# Altium PCB STM32F103ZE.PcbDoc
Units mil, origin at the board's own origin, x right, y up, seen from the top; angles counter-clockwise.
Board outline 5965 x 5965 mil, 2 copper layers (TopLayer, BottomLayer); 20 components, 0 nets, 391 pads, 5 vias.
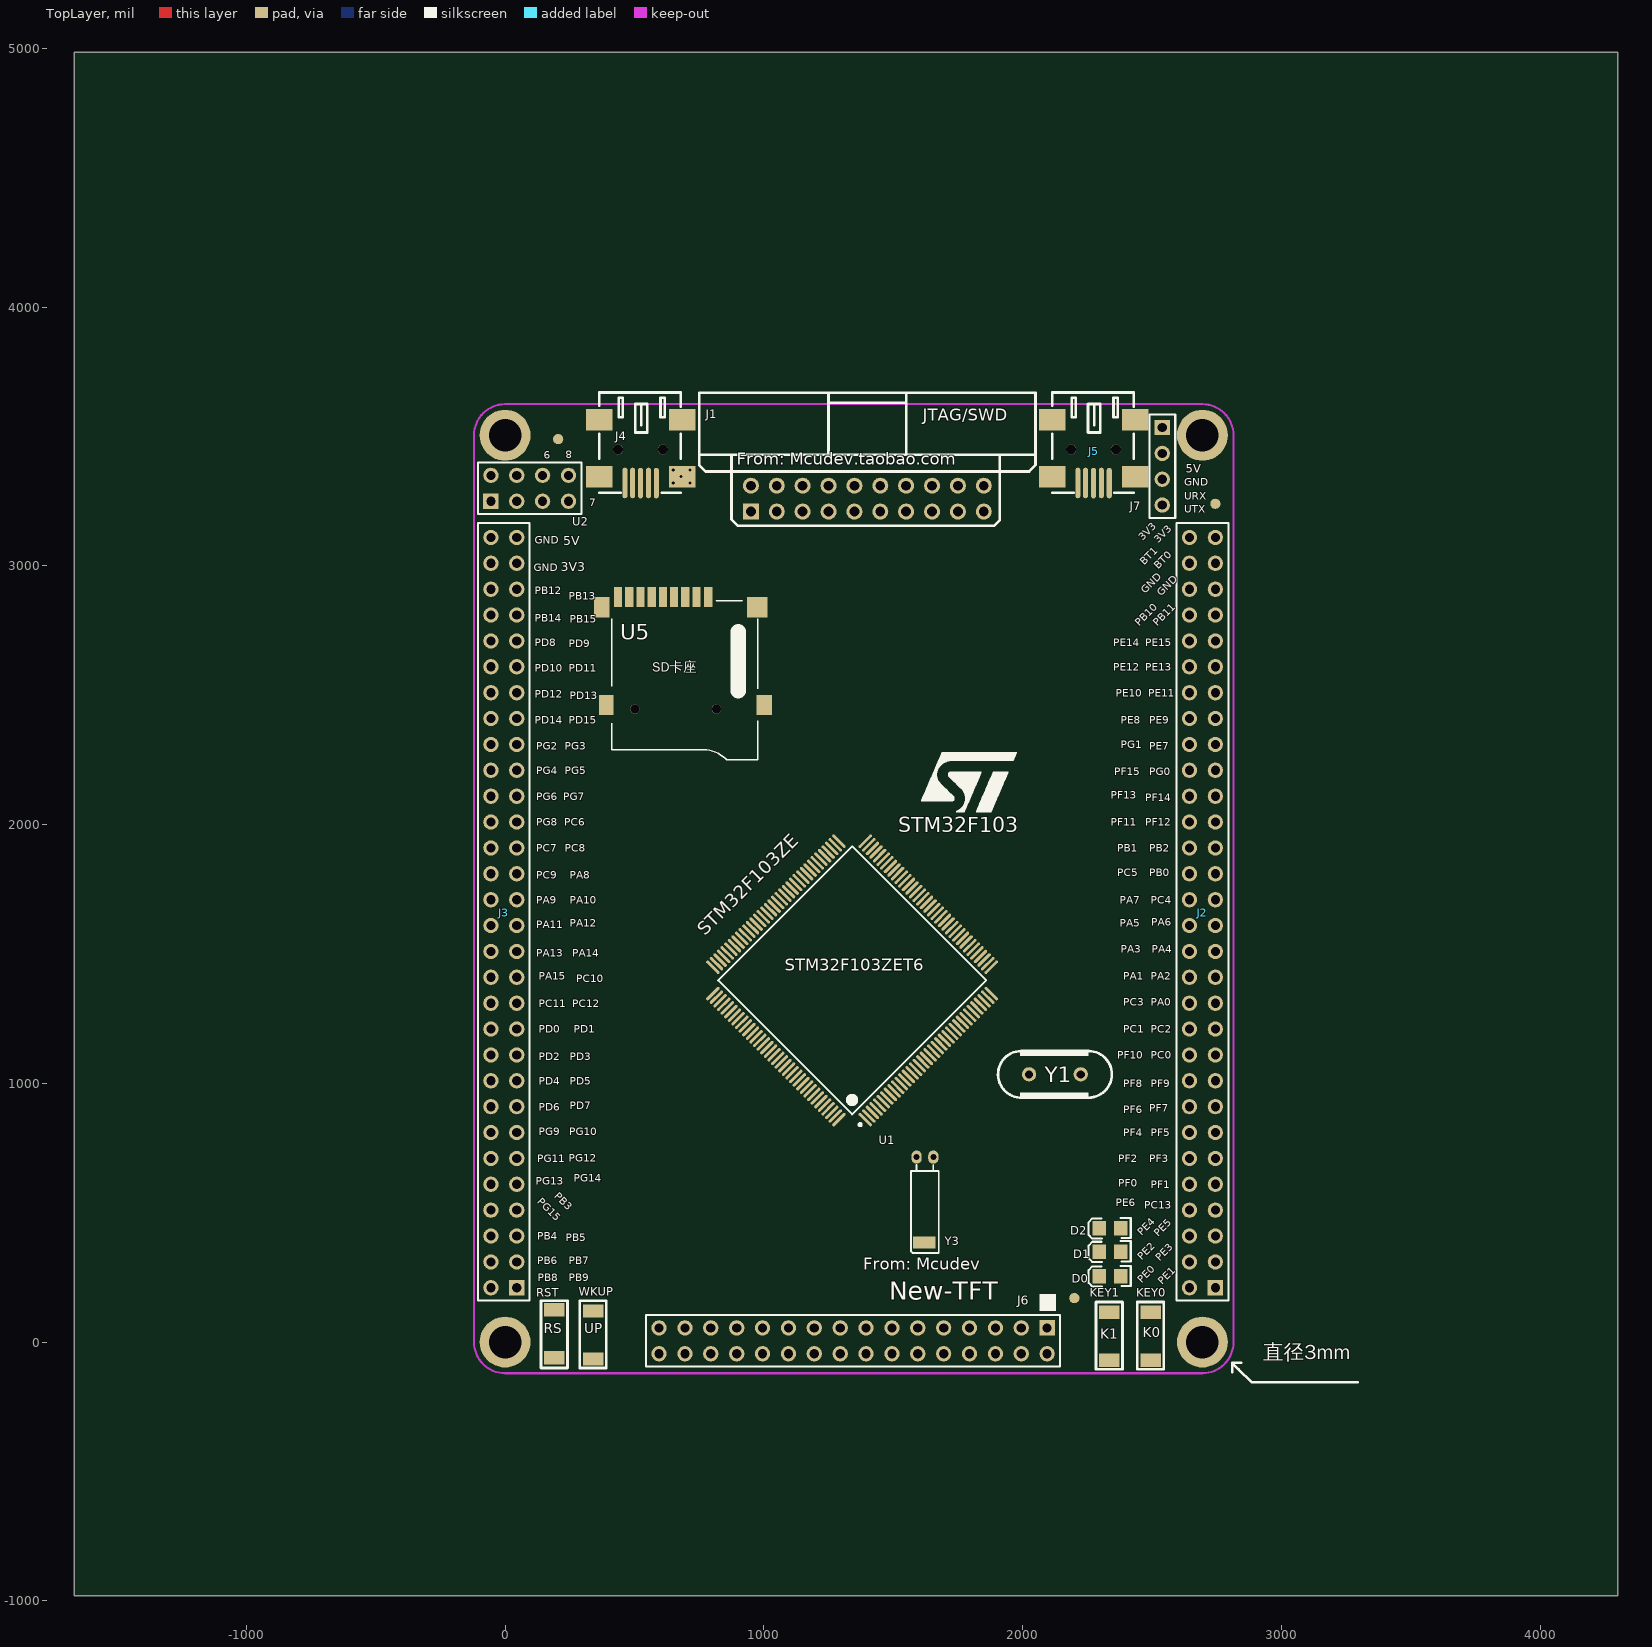
[diagram p0: TopLayer view]
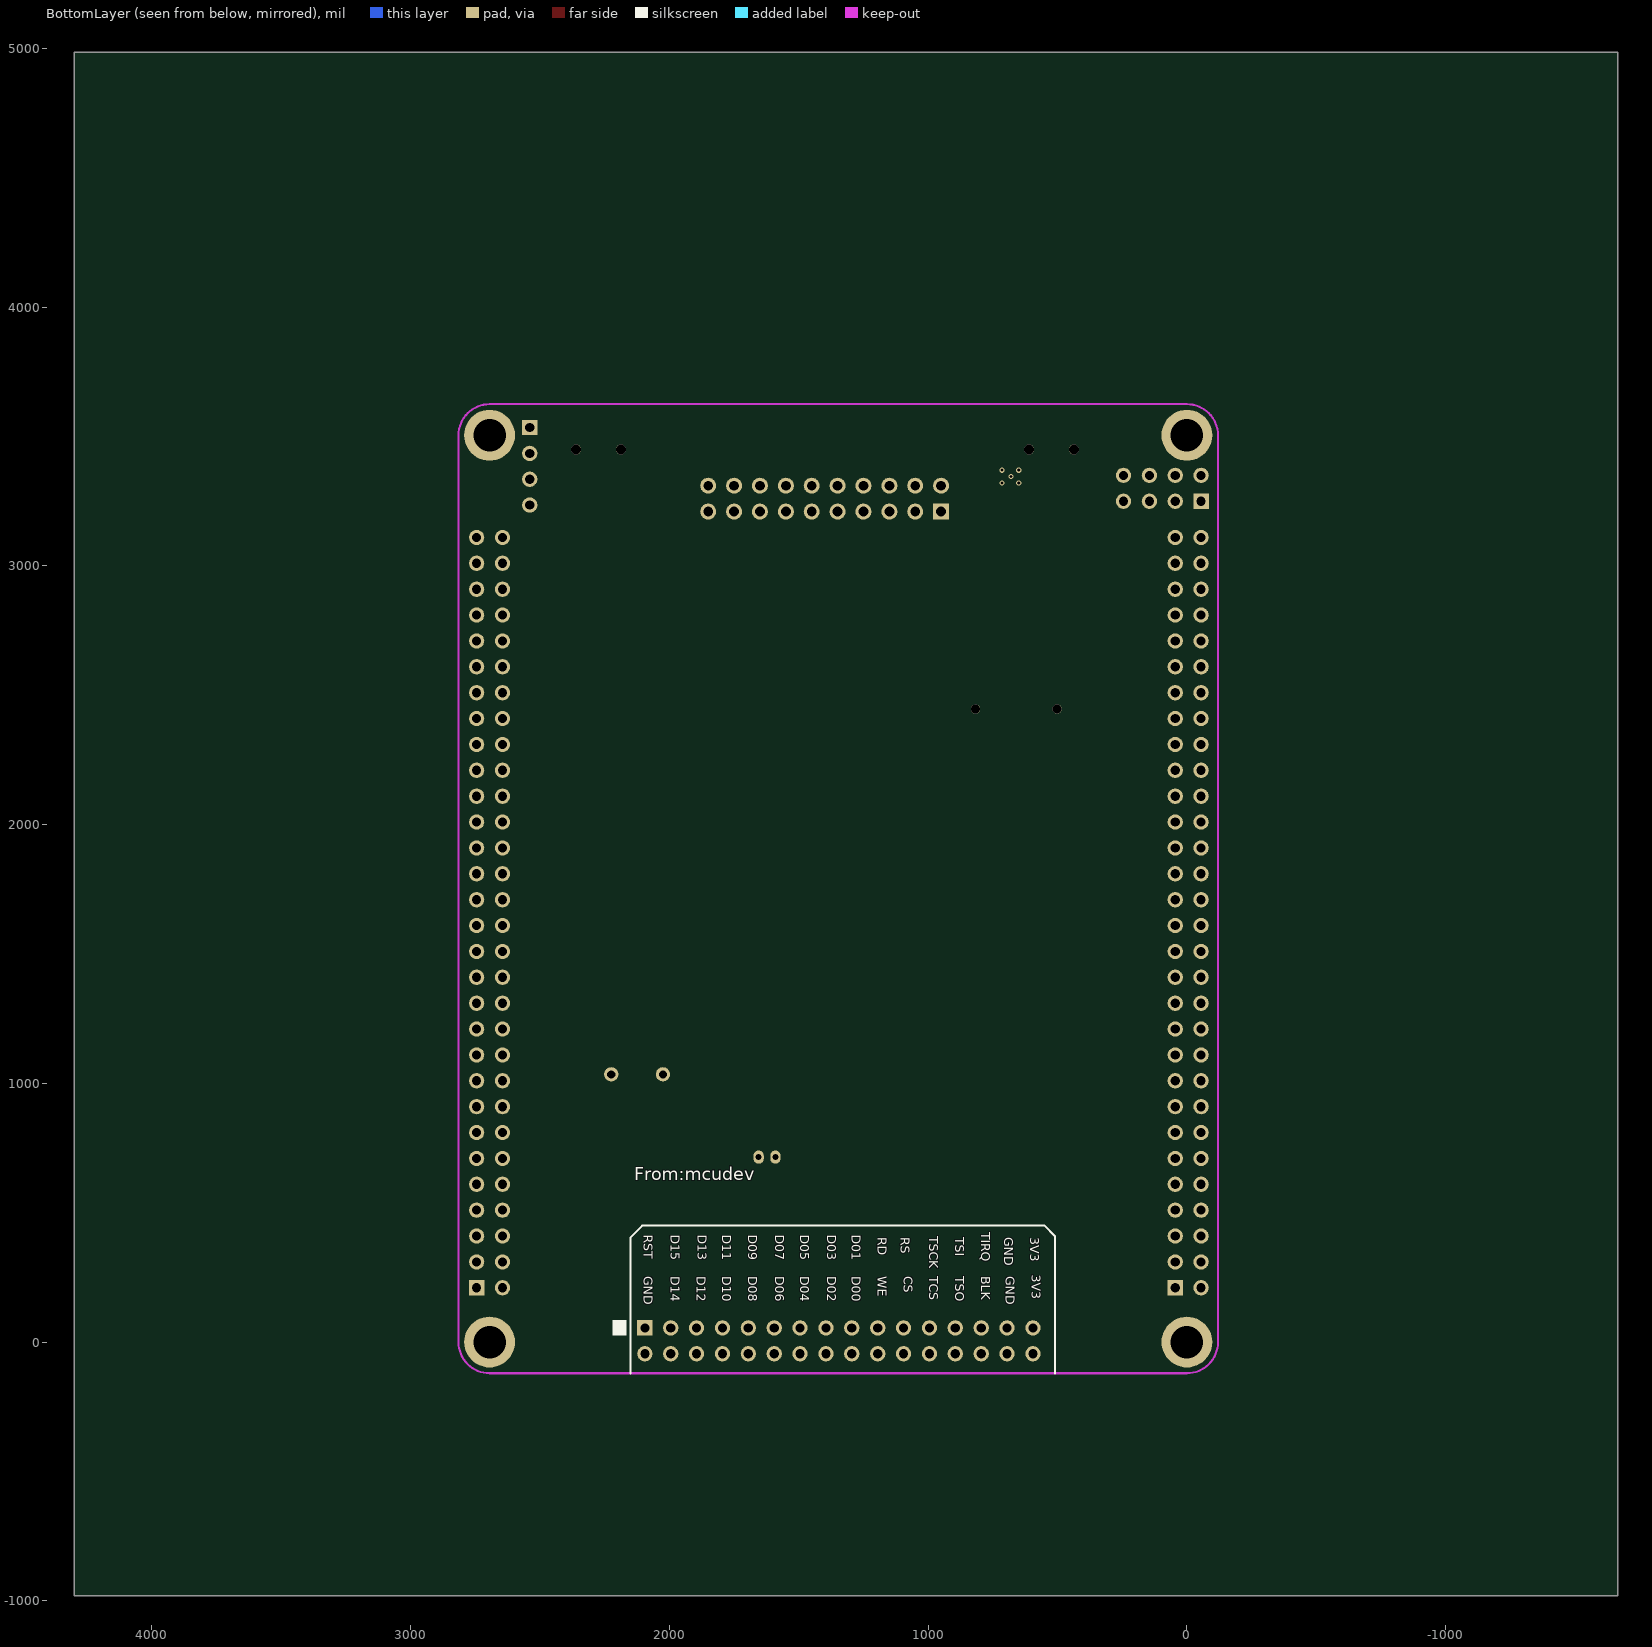
[diagram p1: BottomLayer view, seen from below]

## Layer stack, top to bottom
TopLayer: signal copper 1.4
Dielectric: core 12.6, FR-4, Dk 4.8
BottomLayer: signal copper 1.4

## Board outline
-1665,-980 4300,-980 4300,4985 -1665,4985

## Design rules (kind name [scope] priority, off if disabled: settings)
Clearance [All] p1: gap=7
ComponentClearance [All] p1: gap=1 collisioncheckmode=3 verticalgap=1 showdistances=FALSE
FabricationTestPointUsage TestPointUsage [All] p1: valid=0 allowmultiple=FALSE
FabricationTestpoint Testpoint [(IsPad And (OnTopLayer Or OnBottomLayer))] p1: side=3 testpointundercomponent=TRUE minsize=40 maxsize=100 preferedsize=60 minholesize=20 maxholesize=40 preferedholesize=32 testpointgrid=1 allowsidetop=TRUE allowsidebottom=TRUE usegrid=TRUE gridtolerance=0.01
PlaneClearance [All] p1: clearance=10
PolygonConnect PolygonConnect_1 [All vs (InPadClass('All Pads'))] p1: connectstyle=Relief reliefconductorwidth=15 reliefentries=4 polygonreliefangle="90 Angle"
PolygonConnect [All] p2: connectstyle=Direct reliefconductorwidth=10 reliefentries=4 polygonreliefangle="90 Angle"
RoutingVias [All] p1: holewidth=12 width=20 viastyle="Through Hole" minholewidth=12 minwidth=20 maxholewidth=12 maxwidth=20
SilkscreenOverComponentPads [All] p1: minsilkscreentomaskgap=10
SolderMaskExpansion [All] p1: expansion=2
Width [All] p1: maxlimit=60 minlimit=8 preferedwidth=8 minimp=50.000000 maximp=50.000000 favimp=50.000000
23 further rules are at their usual default settings.

## Components (designator, comment, footprint, x,y, rotation, side; value= is the part's Value field where it differs from the comment)
D0 "LED" LED0805 2380,255 r0 top
D1 "LED" LED0805 2380,350 r0 top
D2 "LED" LED0805 2380,440 r0 top
J1 "ARM_JTAG" JTAG20P 950,3210 r0 top
J2 "IO_30X2" IDE2X30 2745,210 r90 top
J3 "IO_30X2" IDE2X30 45,210 r90 top
J4 "MiniUSB" MINI_USB 584.39,3320.13 r0 top
J5 "MiniUSB" MINI_USB 2335,3320.13 r0 top
J6 "Header 16X2" IDE2X16-2.54 2095,55 r0 top
J7 "ISP_COM" SIP1X4-2.54mm 2540,3535 r270 top
KEY0 "Key" key 2495,-70 r90 top
KEY1 "Key" key 2335,-70 r90 top
RST "Jumper" key 190,125.04 r270 top
U1 "STM32F103ZET6" LQFP144N 1341,1398 r135 top
U2 "NRF2401" IDE2x4-2.54 -55,3255 r0 top
U5 "MiniSD" TF_SD 785,2880 r180 top
WKUP "Key" key 340,-65 r90 top
Y1 "8MHz" JZ49S 2025,1035 r0 top
Y3 "32.768k" 32.768K 1655,715 r180 top
? "Comment" ST_Log 1765,2145 r0 top

## Footprints (in the part's own frame and the unit in brackets; to place one, negate y for a bottom-side part, rotate by r counter-clockwise, add the part's x,y. Pads: shape width x height; smd on the part's side, far side on the other; paste and mask are expansions set on the pad)
32.768K [mm]
  oval 1x1.3 hole 0.6: 1(0,0) 2(1.64,0)
  rect 2.2x1.2 smd: 3(0.875,8.382)
  silkscreen extent -0.53,0.76 2.2,9.4
IDE2x4-2.54 [mm]
  rect 1.5x1.5 hole 0.9: 1(0,-0.127)
  round 1.5 hole 0.9: 2(0,2.413) 3(2.54,-0.127) 4(2.54,2.413) 5(5.08,-0.127) 6(5.08,2.413) 7(7.62,-0.127) 8(7.62,2.413)
  silkscreen extent -1.27,-1.4 8.89,3.68
IDE2X16-2.54 [mm]
  rect 1.5x1.5 hole 0.9: 1(0,0)
  round 1.5 hole 0.9: 2(0,-2.54) 3(-2.54,0) 4(-2.54,-2.54) 5(-5.08,0) 6(-5.08,-2.54) 7(-7.62,0) 8(-7.62,-2.54) 9(-10.16,0) 10(-10.16,-2.54) 11(-12.7,0) 12(-12.7,-2.54) 13(-15.24,0) 14(-15.24,-2.54) 15(-17.78,0) 16(-17.78,-2.54) 17(-20.32,0) 18(-20.32,-2.54) 19(-22.86,0) 20(-22.86,-2.54) 21(-25.4,0) 22(-25.4,-2.54) 23(-27.94,0) 24(-27.94,-2.54) 25(-30.48,0) 26(-30.48,-2.54) 27(-33.02,0) 28(-33.02,-2.54) 29(-35.56,0) 30(-35.56,-2.54) 31(-38.1,0) 32(-38.1,-2.54)
  silkscreen extent -39.37,-3.81 1.27,3.3
IDE2X30 [mm]
  rect 1.5x1.5 hole 0.9: 1(0,0)
  round 1.5 hole 0.9: 2(0,2.54) 3(2.54,0) 4(2.54,2.54) 5(5.08,0) 6(5.08,2.54) 7(7.62,0) 8(7.62,2.54) 9(10.16,0) 10(10.16,2.54) 11(12.7,0) 12(12.7,2.54) 13(15.24,0) 14(15.24,2.54) 15(17.78,0) 16(17.78,2.54) 17(20.32,0) 18(20.32,2.54) 19(22.86,0) 20(22.86,2.54) 21(25.4,0) 22(25.4,2.54) 23(27.94,0) 24(27.94,2.54) 25(30.48,0) 26(30.48,2.54) 27(33.02,0) 28(33.02,2.54) 29(35.56,0) 30(35.56,2.54) 31(38.1,0) 32(38.1,2.54) 33(40.64,0) 34(40.64,2.54) 35(43.18,0) 36(43.18,2.54) 37(45.72,0) 38(45.72,2.54) 39(48.26,0) 40(48.26,2.54) 41(50.8,0) 42(50.8,2.54) 43(53.34,0) 44(53.34,2.54) 45(55.88,0) 46(55.88,2.54) 47(58.42,0) 48(58.42,2.54) 49(60.96,0) 50(60.96,2.54) 51(63.5,0) 52(63.5,2.54) 53(66.04,0) 54(66.04,2.54) 55(68.58,0) 56(68.58,2.54) 57(71.12,0) 58(71.12,2.54) 59(73.66,0) 60(73.66,2.54)
  silkscreen extent -1.27,-1.27 75.06,3.81
JTAG20P [mil]
  rect 62x62 hole 38: 1(0,0)
  round 62 hole 38: 2(0,100) 3(100,0) 4(100,100) 5(200,0) 6(200,100) 7(300,0) 8(300,100) 9(400,0) 10(400,100) 11(500,0) 12(500,100) 13(600,0) 14(600,100) 15(700,0) 16(700,100) 17(800,0) 18(800,100) 19(900,0) 20(900,100)
  silkscreen extent -200,-55 1100,460
JZ49S [mm]
  round 1.4 hole 0.8: 1(0,0) 2(5.08,0)
  silkscreen extent -3.05,-2.29 8.13,2.29
key [mm]
  rect 1.3x2 smd paste+0 mask+0.2: 1(0,0) 2(4.7,0)
  silkscreen extent -0.89,-1.3 5.72,1.3
LED0805 [mil]
  rect 52x56 smd: 1(0,0) 2(-84,0)
  silkscreen extent -125,-40 38,40
LQFP144N [mm]
  oval 1.75x0.297 smd: 1(-10.575,8.75) 2(-10.575,8.25) 3(-10.575,7.75) 4(-10.575,7.25) 5(-10.575,6.75) 6(-10.575,6.25) 7(-10.575,5.75) 8(-10.575,5.25) 9(-10.575,4.75) 10(-10.575,4.25) 11(-10.575,3.75) 12(-10.575,3.25) 13(-10.575,2.75) 14(-10.575,2.25) 15(-10.575,1.75) 16(-10.575,1.25) 17(-10.575,0.75) 18(-10.575,0.25) 19(-10.575,-0.25) 20(-10.575,-0.75) 21(-10.575,-1.25) 22(-10.575,-1.75) 23(-10.575,-2.25) 24(-10.575,-2.75) 25(-10.575,-3.25) 26(-10.575,-3.75) 27(-10.575,-4.25) 28(-10.575,-4.75) 29(-10.575,-5.25) 30(-10.575,-5.75) 31(-10.575,-6.25) 32(-10.575,-6.75) 33(-10.575,-7.25) 34(-10.575,-7.75) 35(-10.575,-8.25) 36(-10.575,-8.75) 73(10.575,-8.75) 74(10.575,-8.25) 75(10.575,-7.75) 76(10.575,-7.25) 77(10.575,-6.75) 78(10.575,-6.25) 79(10.575,-5.75) 80(10.575,-5.25) 81(10.575,-4.75) 82(10.575,-4.25) 83(10.575,-3.75) 84(10.575,-3.25) 85(10.575,-2.75) 86(10.575,-2.25) 87(10.575,-1.75) 88(10.575,-1.25) 89(10.575,-0.75) 90(10.575,-0.25) 91(10.575,0.25) 92(10.575,0.75) 93(10.575,1.25) 94(10.575,1.75) 95(10.575,2.25) 96(10.575,2.75) 97(10.575,3.25) 98(10.575,3.75) 99(10.575,4.25) 100(10.575,4.75) 101(10.575,5.25) 102(10.575,5.75) 103(10.575,6.25) 104(10.575,6.75) 105(10.575,7.25) 106(10.575,7.75) 107(10.575,8.25) 108(10.575,8.75)
  oval 0.297x1.75 smd: 37(-8.75,-10.575) 38(-8.25,-10.575) 39(-7.75,-10.575) 40(-7.25,-10.575) 41(-6.75,-10.575) 42(-6.25,-10.575) 43(-5.75,-10.575) 44(-5.25,-10.575) 45(-4.75,-10.575) 46(-4.25,-10.575) 47(-3.75,-10.575) 48(-3.25,-10.575) 49(-2.75,-10.575) 50(-2.25,-10.575) 51(-1.75,-10.575) 52(-1.25,-10.575) 53(-0.75,-10.575) 54(-0.25,-10.575) 55(0.25,-10.575) 56(0.75,-10.575) 57(1.25,-10.575) 58(1.75,-10.575) 59(2.25,-10.575) 60(2.75,-10.575) 61(3.25,-10.575) 62(3.75,-10.575) 63(4.25,-10.575) 64(4.75,-10.575) 65(5.25,-10.575) 66(5.75,-10.575) 67(6.25,-10.575) 68(6.75,-10.575) 69(7.25,-10.575) 70(7.75,-10.575) 71(8.25,-10.575) 72(8.75,-10.575) 109(8.75,10.575) 110(8.25,10.575) 111(7.75,10.575) 112(7.25,10.575) 113(6.75,10.575) 114(6.25,10.575) 115(5.75,10.575) 116(5.25,10.575) 117(4.75,10.575) 118(4.25,10.575) 119(3.75,10.575) 120(3.25,10.575) 121(2.75,10.575) 122(2.25,10.575) 123(1.75,10.575) 124(1.25,10.575) 125(0.75,10.575) 126(0.25,10.575) 127(-0.25,10.575) 128(-0.75,10.575) 129(-1.25,10.575) 130(-1.75,10.575) 131(-2.25,10.575) 132(-2.75,10.575) 133(-3.25,10.575) 134(-3.75,10.575) 135(-4.25,10.575) 136(-4.75,10.575) 137(-5.25,10.575) 138(-5.75,10.575) 139(-6.25,10.575) 140(-6.75,10.575) 141(-7.25,10.575) 142(-7.75,10.575) 143(-8.25,10.575) 144(-8.75,10.575)
  silkscreen extent -10.7,-9.3 9.3,9.57
MINI_USB [mm]
  oval 0.5x3 smd: 1(0,0) 2(-0.775,0.009) 3(-1.549,0) 4(-2.324,0.009) 5(-3.086,0.009)
  rect 2.6x2.1 smd: 6(-5.588,0.635) 7(2.54,0.635) 8(2.54,6.223) 9(-5.588,6.223)
  round 1 hole 1: ""(-3.749,3.299) ""(0.651,3.299)
  silkscreen extent -5.59,-0.94 2.41,8.89
SIP1X4-2.54mm [mm]
  rect 1.5x1.5 hole 0.9: 1(0,0)
  round 1.5 hole 0.9: 2(2.54,0) 3(5.08,0) 4(7.62,0)
  silkscreen extent -1.27,-1.27 8.89,1.27
ST_Log [mil]
  silkscreen extent -157,-95 212,135
TF_SD [mm]
  round 0.9 hole 0.9 unplated: 0(-0.8,11) 0(7.2,11)
  rect 0.85x2 smd: 1(0,0)
  rect 0.8x2 smd: 2(1.15,0) 3(2.25,0) 4(3.35,0) 5(4.45,0) 6(5.55,0) 7(6.65,0) 8(7.75,0) 9(8.85,0)
  rect 1.5x2 smd: 10(-5.5,10.6) 10(10.45,1)
  rect 2x2 smd: 10(-4.8,1)
  rect 1.4x2 smd: 10(10,10.6)
  silkscreen extent -4.87,0.36 9.49,16

## Part data
J1: library part JTAG, "JTAG"
J2 J3: library part "Header 30X2", "Header, 30-Pin, Dual row"
J6: "Header, 16-Pin, Dual row"
J7: library part "Header 4", "Header, 4-Pin"
KEY0 KEY1 WKUP: library part Jumper, "Jumper Wire"
RST: "Jumper Wire"
U1: library part STM32F103ZET6_1
U2: library part "Header 4X2", "Header, 4-Pin, Dual row"
Y1: library part XTAL, "Crystal Oscillator"
Y3: library part CRYSTAL, "Crystal 8MHz PLUG"

## Free pads (board coordinates)
  round 39.37 smd: 1(205,3490) ""(2200,170) ""(2745,3240)
  round 196.85 hole 125.98: ""(0,0) ""(0,3505) ""(2695,0) ""(2695,3505)

## Via types
v1: diameter 20, hole 12, TopLayer to BottomLayer, 5 vias

## Nets (pads, with @x,y where several pads share a name; then routed paths per layer and width w, separated by ;. In a path a pad name is that pad's centre, name@x,y a point inside that pad or via, vN(x,y) a via of type N, cw(c..) or ccw(c..) an arc to the next point about the centre after c; other vN are vias at no path point)
pads on no net: D0.1 D0.2 D1.1 D1.2 D2.1 D2.2 J1.1 J1.2 J1.3 J1.4 J1.5 J1.6 J1.7 J1.8 J1.9 J1.10 J1.11 J1.12 J1.13 J1.14 J1.15 J1.16 J1.17 J1.18 J1.19 J1.20 J2.1 J2.2 J2.3 J2.4 J2.5 J2.6 J2.7 J2.8 J2.9 J2.10 J2.11 J2.12 J2.13 J2.14 J2.15 J2.16 J2.17 J2.18 J2.19 J2.20 J2.21 J2.22 J2.23 J2.24 J2.25 J2.26 J2.27 J2.28 J2.29 J2.30 J2.31 J2.32 J2.33 J2.34 J2.35 J2.36 J2.37 J2.38 J2.39 J2.40 J2.41 J2.42 J2.43 J2.44 J2.45 J2.46 J2.47 J2.48 J2.49 J2.50 J2.51 J2.52 J2.53 J2.54 J2.55 J2.56 J2.57 J2.58 J2.59 J2.60 J3.1 J3.2 J3.3 J3.4 J3.5 J3.6 J3.7 J3.8 J3.9 J3.10 J3.11 J3.12 J3.13 J3.14 J3.15 J3.16 J3.17 J3.18 J3.19 J3.20 J3.21 J3.22 J3.23 J3.24 J3.25 J3.26 J3.27 J3.28 J3.29 J3.30 J3.31 J3.32 J3.33 J3.34 J3.35 J3.36 J3.37 J3.38 J3.39 J3.40 J3.41 J3.42 J3.43 J3.44 J3.45 J3.46 J3.47 J3.48 J3.49 J3.50 J3.51 J3.52 J3.53 J3.54 J3.55 J3.56 J3.57 J3.58 J3.59 J3.60 J4. J4.1 J4.2 J4.3 J4.4 J4.5 J4.6 J4.7 J4.8 J4.9 J5. J5.1 J5.2 J5.3 J5.4 J5.5 J5.6 J5.7 J5.8 J5.9 J6.1 J6.2 J6.3 J6.4 J6.5 J6.6 J6.7 J6.8 J6.9 J6.10 J6.11 J6.12 J6.13 J6.14 J6.15 J6.16 J6.17 J6.18 J6.19 J6.20 J6.21 J6.22 J6.23 J6.24 J6.25 J6.26 J6.27 J6.28 J6.29 J6.30 J6.31 J6.32 J7.1 J7.2 J7.3 J7.4 KEY0.1 KEY0.2 KEY1.1 KEY1.2 RST.1 RST.2 U1.1 U1.2 U1.3 U1.4 U1.5 U1.6 U1.7 U1.8 U1.9 U1.10 U1.11 U1.12 U1.13 U1.14 U1.15 U1.16 U1.17 U1.18 U1.19 U1.20 U1.21 U1.22 U1.23 U1.24 U1.25 U1.26 U1.27 U1.28 U1.29 U1.30 U1.31 U1.32 U1.33 U1.34 U1.35 U1.36 U1.37 U1.38 U1.39 U1.40 U1.41 U1.42 U1.43 U1.44 U1.45 U1.46 U1.47 U1.48 U1.49 U1.50 U1.51 U1.52 U1.53 U1.54 U1.55 U1.56 U1.57 U1.58 U1.59 U1.60 U1.61 U1.62 U1.63 U1.64 U1.65 U1.66 U1.67 U1.68 U1.69 U1.70 U1.71 U1.72 U1.73 U1.74 U1.75 U1.76 U1.77 U1.78 U1.79 U1.80 U1.81 U1.82 U1.83 U1.84 U1.85 U1.86 U1.87 U1.88 U1.89 U1.90 U1.91 U1.92 U1.93 U1.94 U1.95 U1.96 U1.97 U1.98 U1.99 U1.100 U1.101 U1.102 U1.103 U1.104 U1.105 U1.106 U1.107 U1.108 U1.109 U1.110 U1.111 U1.112 U1.113 U1.114 U1.115 U1.116 U1.117 U1.118 U1.119 U1.120 U1.121 U1.122 U1.123 U1.124 U1.125 U1.126 U1.127 U1.128 U1.129 U1.130 U1.131 U1.132 U1.133 U1.134 U1.135 U1.136 U1.137 U1.138 U1.139 U1.140 U1.141 U1.142 U1.143 U1.144 U2.1 U2.2 U2.3 U2.4 U2.5 U2.6 U2.7 U2.8 U5.0 U5.1 U5.2 U5.3 U5.4 U5.5 U5.6 U5.7 U5.8 U5.9 U5.10 WKUP.1 WKUP.2 Y1.1 Y1.2 Y3.1 Y3.2 Y3.3
copper on no net:
  other v1: 650,3320 715,3320 679.39,3345.13 650,3370 715,3370

## Keep-outs
KeepOutLayer:
  lines w8: -120.21,0 ccw(c0,0) 0,-120.21 2695,-120.21 ccw(c2695,0) 2815.21,0 2815.21,3505 ccw(c2695,3505) 2695,3625.21 0,3625.21 ccw(c0,3505) -120.21,3505 -120.21,0

## Silkscreen, mask and mechanical layers (free items; w line width, h text height)
TopOverlay:
  lines w10: 2810.25,-115.61 2810.25,-80.25 ; 2845.61,-80.25 2810.25,-80.25 ; 3295,-155 2885,-155 2835,-105 2810.25,-80.25
  text "JTAG/SWD" at 1615,3545 h80
  text "8" at 260,3445 h30 r180
  text "6" at 150,3415 h30
  text "From: Mcudev.taobao.com" at 895,3375 h80
  text "5V" at 2630,3360 h32
  text "GND" at 2625,3310 h30
  text "URX" at 2625,3255 h30
  text "7" at 325,3230 h30
  text "UTX" at 2625,3205 h30
  text "3V3" at 2465,3095 h30 r45
  text "GND" at 115,3085 h30
  text "3V3" at 2525,3085 h30 r45
  text "5V" at 225,3080 h35
  text "BT1" at 2470,3000 h30 r45
  text "BT0" at 2525,2985 h30 r45
  text "GND" at 110,2980 h30
  text "3V3" at 215,2980 h35
  text "PB12" at 115,2890 h30
  text "GND" at 2475,2890 h30 r45
  text "GND" at 2535,2880 h30 r45
  text "PB13" at 245,2870 h30
  text "PB14" at 115,2785 h30
  text "PB15" at 250,2780 h30
  text "PB10" at 2450,2765 h30 r45
  text "PB11" at 2520.1,2765.1 h30 r45
  text "PD8" at 115,2690 h30
  text "PE14" at 2350,2690 h30
  text "PE15" at 2475,2690 h30
  text "PD9" at 245,2685 h30
  text "PE12" at 2350,2595 h30
  text "PE13" at 2475,2595 h30
  text "PD10" at 115,2590 h30
  text "PD11" at 245,2590 h30
  text "SD卡座" at 568.16,2577.8 h65
  text "PE10" at 2360,2495 h30
  text "PE11" at 2485,2495 h30
  text "PD12" at 115,2490 h30
  text "PD13" at 250,2485 h30
  text "PD14" at 115,2390 h30
  text "PD15" at 245,2390 h30
  text "PE8" at 2380,2390 h30
  text "PE9" at 2490,2390 h30
  text "PG1" at 2380,2295 h30
  text "PG2" at 120,2290 h30
  text "PG3" at 230,2290 h30
  text "PE7" at 2490,2290 h30
  text "PG4" at 120,2195 h30
  text "PG5" at 230,2195 h30
  text "PF15" at 2355,2190 h30
  text "PG0" at 2490,2190 h30
  text "PF13" at 2340,2100 h30
  text "PG6" at 120,2095 h30
  text "PG7" at 225,2095 h30
  text "PF14" at 2475,2090 h30
  text "PC6" at 229.17,1995.83 h30
  text "PG8" at 120,1995 h30
  text "PF11" at 2340,1995 h30
  text "PF12" at 2475,1995 h30
  text "STM32F103" at 1519.09,1951.91 h100
  text "PC7" at 120,1895 h30
  text "PC8" at 230,1895 h30
  text "PB1" at 2365,1895 h30
  text "PB2" at 2490,1895 h30
  text "PC5" at 2365,1800 h30
  text "PB0" at 2490,1800 h30
  text "PC9" at 120,1790 h30
  text "PA8" at 250,1790 h30
  text "PA9" at 120,1695 h30
  text "PA10" at 250,1695 h30
  text "PA7" at 2375,1695 h30
  text "PC4" at 2495,1695 h30
  text "PA6" at 2496.48,1608.52 h30
  text "PA12" at 250,1605 h30
  text "PA5" at 2375,1605 h30
  text "PA11" at 120,1600 h30
  text "STM32F103ZE" at 785,1555 h90 r45
  text "PA3" at 2380,1505 h30
  text "PA4" at 2500,1505 h30
  text "PA13" at 120,1490 h30
  text "PA14" at 260,1490 h30
  text "STM32F103ZET6" at 1080,1420 h80
  text "PA15" at 130,1400 h30
  text "PA1" at 2390,1400 h30
  text "PA2" at 2495,1400 h30
  text "PC10" at 275,1390 h30
  text "PC3" at 2390,1300 h30
  text "PA0" at 2495,1300 h30
  text "PC11" at 130,1295 h30
  text "PC12" at 260,1295 h30
  text "PD0" at 130,1195 h30
  text "PD1" at 265,1195 h30
  text "PC1" at 2390,1195 h30
  text "PC2" at 2495,1195 h30
  text "PF10" at 2365,1095 h30
  text "PC0" at 2495,1095 h30
  text "PD2" at 130,1090 h30
  text "PD3" at 250,1090 h30
  text "PD4" at 130,995 h30
  text "PD5" at 250,995 h30
  text "PF8" at 2390,985 h30
  text "PF9" at 2495,985 h30
  text "PD7" at 250,900 h30
  text "PD6" at 130,895 h30
  text "PF7" at 2490,890 h30
  text "PF6" at 2390,885 h30
  text "PG9" at 130,800 h30
  text "PG10" at 247.41,799.73 h30
  text "PF4" at 2390,795 h30
  text "PF5" at 2495,795 h30
  text "PG12" at 245.27,697.39 h30
  text "PG11" at 125,695 h30
  text "PF2" at 2370,695 h30
  text "PF3" at 2490,695 h30
  text "PG14" at 265,620 h30
  text "PG13" at 117.67,607.67 h30
  text "PF0" at 2370,600 h30
  text "PF1" at 2495,595 h30
  text "PB3" at 187.52,562.01 h30 r315
  text "PG15" at 121.32,541.07 h30 r315
  text "PE6" at 2360,525 h30
  text "PC13" at 2470,515 h30
  text "PE4" at 2460,410 h30 r45
  text "PE5" at 2525,405 h30 r45
  text "PB4" at 125,395 h30
  text "PB5" at 235,390 h30
  text "PE2" at 2460,315 h30 r45
  text "PE3" at 2530,310 h30 r45
  text "PB6" at 125,300 h30
  text "PB7" at 245,300 h30
  text "From: Mcudev" at 1385,265 h80
  text "PB8" at 125.25,235.25 h30
  text "PB9" at 245,235 h30
  text "PE0" at 2460,225 h30 r45
  text "PE1" at 2540,220 h30 r45
  text "New-TFT" at 1485,140 h120
  text "RS" at 150,20 h65
  text "UP" at 305,20 h65
  text "K0" at 2465,5 h65
  text "K1" at 2300,0 h65
  text "直径3mm" at 2930,-85 h100
BottomOverlay:
  rectangle: 2165,25 2220,85
  lines w8: 510,-120.21 510,350 510,410 550,450 1095,450 2105,450 2150,405 2150,-120.21
  text "From:mcudev" at 2135,625 h50
  text "TIRQ" at 795,425 h35 r90
  text "D01" at 1295,415 h35 r90
  text "D03" at 1390,415 h35 r90
  text "D05" at 1495,415 h35 r90
  text "D07" at 1590,415 h35 r90
  text "D09" at 1695,415 h35 r90
  text "D11" at 1795,415 h35 r90
  text "D13" at 1890,415 h35 r90
  text "D15" at 1995,415 h35 r90
  text "RST" at 2100,415 h35 r90
  text "TSCK" at 995,410 h35 r90
  text "3V3" at 605,405 h35 r90
  text "GND" at 705,405 h35 r90
  text "TSI" at 895,405 h35 r90
  text "RS" at 1105,405 h35 r90
  text "RD" at 1195,405 h35 r90
  text "3V3" at 598.78,260 h35 r90
  text "GND" at 700,255 h35 r90
  text "BLK" at 795,255 h35 r90
  text "TSO" at 895,255 h35 r90
  text "TCS" at 995,255 h35 r90
  text "CS" at 1095,255 h35 r90
  text "WE" at 1195,255 h35 r90
  text "D00" at 1295,255 h35 r90
  text "D02" at 1390,255 h35 r90
  text "D04" at 1495,255 h35 r90
  text "D06" at 1590,255 h35 r90
  text "D08" at 1695,255 h35 r90
  text "D10" at 1795,255 h35 r90
  text "D12" at 1895,255 h35 r90
  text "D14" at 1995,255 h35 r90
  text "GND" at 2100,255 h35 r90

## Dimensions
0,3625.21 to 0,-120.21 on TopOverlay
-120.21,3505 to 2815.21,3505 on TopOverlay
0,3505 to 0,0 on TopOverlay
2695,3505 to 0,3505 on TopOverlay